# Altium PCB Kicker.PcbDoc (part 2 of 2)
Units mil, origin at the board's own origin, x right, y up, seen from the top; angles counter-clockwise.
Board outline 3322.83 x 1346.46 mil, 2 copper layers (Top Layer, Bottom Layer), stack 30.748 mil thick; 41 components, 31 nets, 116 pads, 28 vias.
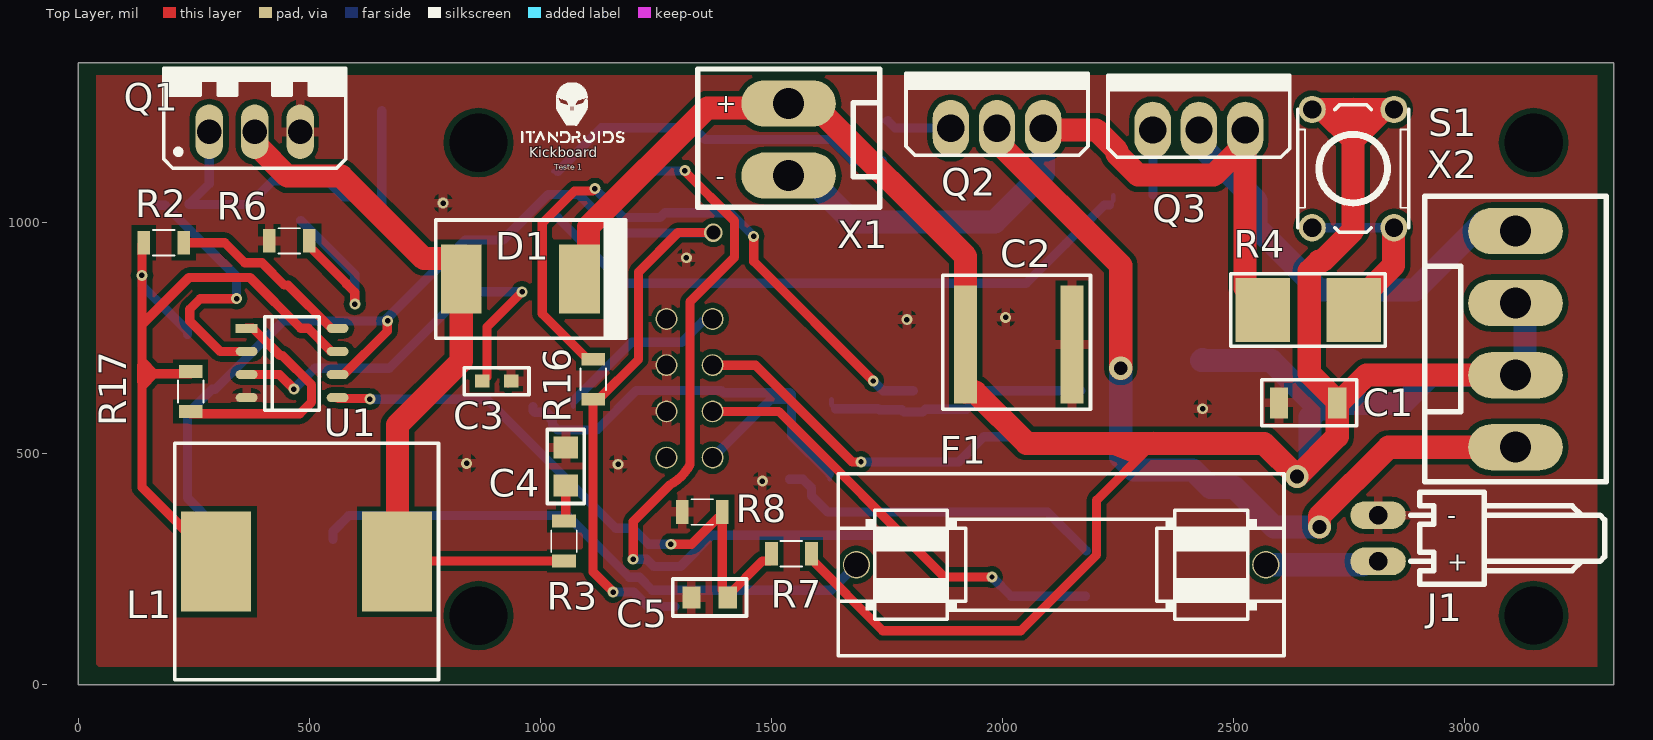
[diagram p0: Top Layer view]

## Part data (continued)
R8 R11 R12 R16: "PANASONIC ELECTRONIC COMPONENTS - ERJ6ENF1201V - RES, THICK FILM, 1K2, 125MW, 1%, REEL", Case Code (Imperial)=0805, Case Code (Metric)=2012, Manufacturer=Panasonic, Manufacturer Part Number=ERJ-6ENF1201V, Max Operating Temperature=155°C, Max Power Dissipation=125mW, Min Operating Temperature=-55°C, Package Quantity=1, Resistance=1.2kR, Temperature Coefficient=100ppm/°C, Tolerance=1%, Voltage Rating=150V, Case/Package=0805, Category="Chip SMD Resistors", ComponentLink1Description=https://datasheet.ciiva.com/11821/0900766b80f80784-11821543.pdf?src-supplier=RSComponents, ComponentLink1URL=https://datasheet.ciiva.com/11821/0900766b80f80784-11821543.pdf?src-supplier=RSComponents, ComponentLink2Description=https://datasheet.ciiva.com/7802/426256-7802438.pdf?src-supplier=Element14, ComponentLink2URL=https://datasheet.ciiva.com/7802/426256-7802438.pdf?src-supplier=Element14, ComponentLink3Description=https://datasheet.ciiva.com/16775/70260748-16775350.pdf?src-supplier=Allied+Electronics, ComponentLink3URL=https://datasheet.ciiva.com/16775/70260748-16775350.pdf?src-supplier=Allied+Electronics, ComponentLink4Description=https://datasheet.ciiva.com/9198/aoa0000ce2-9198663.pdf?src-supplier=Avnet, ComponentLink4URL=https://datasheet.ciiva.com/9198/aoa0000ce2-9198663.pdf?src-supplier=Avnet, ComponentLink5Description=https://datasheet.ciiva.com/22687/1678782-22687448.pdf?src-supplier=Element14, ComponentLink5URL=https://datasheet.ciiva.com/22687/1678782-22687448.pdf?src-supplier=Element14, ComponentLink6Description=https://datasheet.ciiva.com/46372/1678782-46372712.pdf?src-supplier=Element14, ComponentLink6URL=https://datasheet.ciiva.com/46372/1678782-46372712.pdf?src-supplier=Element14, ComponentLink7Description=https://datasheet.ciiva.com/46372/1678782-46372713.pdf?src-supplier=Element14, ComponentLink7URL=https://datasheet.ciiva.com/46372/1678782-46372713.pdf?src-supplier=Element14, ComponentLink8Description=https://datasheet.ciiva.com/22667/1678782-22667898.pdf?src-supplier=Element14, ComponentLink8URL=https://datasheet.ciiva.com/22667/1678782-22667898.pdf?src-supplier=Element14, ComponentLink9Description=https://datasheet.ciiva.com/17215/aoa0000ce2-17215019.pdf?src-supplier=Avnet+Europe, ComponentLink9URL=https://datasheet.ciiva.com/17215/aoa0000ce2-17215019.pdf?src-supplier=Avnet+Europe, ComponentLink10Description=https://datasheet.ciiva.com/6138/426256-6138188.pdf?src-supplier=Farnell, ComponentLink10URL=https://datasheet.ciiva.com/6138/426256-6138188.pdf?src-supplier=Farnell, ComponentLink11Description=https://datasheet.ciiva.com/24069/aoa0000ce2-24069708.pdf?src-supplier=Mouser, ComponentLink11URL=https://datasheet.ciiva.com/24069/aoa0000ce2-24069708.pdf?src-supplier=Mouser, ComponentLink12Description=https://datasheet.ciiva.com/30129/aoa0000ce2-30129052.pdf?src-supplier=Onlinecomponents.com, ComponentLink12URL=https://datasheet.ciiva.com/30129/aoa0000ce2-30129052.pdf?src-supplier=Onlinecomponents.com, ComponentLink13Description=https://datasheet.ciiva.com/16773/70260748-16773646.pdf?src-supplier=Allied+Electronics, ComponentLink13URL=https://datasheet.ciiva.com/16773/70260748-16773646.pdf?src-supplier=Allied+Electronics, Composition="Thick Film", Contact Plating=Tin, Depth=1.25mm, Features="Automotive AEC-Q200", Height=0.6mm, Lead Free="Lead Free", Length=2mm, Military Standard=Not, Mount="Surface Mount", Number of Terminations=2, Packaging="Tape and Reel", Power Rating=125mW, Pricing 1="1=0,10000, 10=0,07200, 100=0,02750, 1000=0,01210, 2500=0,01045 (USD)", Radiation Hardening=No, REACH SVHC="No SVHC", RoHS=Yes, Stock 1=22603, Supplier 1=Digi-Key, Termination=SMD/SMT, Voltage Rating (DC)=150V, Width=0.049inch
R9 R15: library part Res_390R_0805, "RES SMD 0805 390R 5% 1/8W", Supplier Part Number 1=311-390ARDKR-ND, Tolerance=1%, Supplier 1=Digi-Key
S1: "Switch Tactile N.O. SPST Flat Plunger PC Pins 0.05A 24VDC 2.55N Thru-Hole Bag", Contact Current Rating=50mA, Contact Resistance=100mR, Manufacturer=Omron, Max Operating Temperature=70°C, Max Voltage Rating (DC)=24V, Min Operating Temperature=-25°C, Operating Force=2.55N, Package Quantity=1500, Actuator Length=0.9mm, Actuator Type=Standard, Category="Switch Accessories", ComponentLink1Description=https://datasheet.ciiva.com/1532/611570-1532565.pdf?src-supplier=Element14, ComponentLink1URL=https://datasheet.ciiva.com/1532/611570-1532565.pdf?src-supplier=Element14, ComponentLink2Description=https://datasheet.ciiva.com/48509/b3f-48509461.pdf?src-supplier=Distrelec, ComponentLink2URL=https://datasheet.ciiva.com/48509/b3f-48509461.pdf?src-supplier=Distrelec, ComponentLink3Description=https://datasheet.ciiva.com/2899/b3f-0811-2899831.pdf?src-supplier=Digi-Key, ComponentLink3URL=https://datasheet.ciiva.com/2899/b3f-0811-2899831.pdf?src-supplier=Digi-Key, ComponentLink4Description=https://datasheet.ciiva.com/7986/en-b3f-7986906.pdf?src-supplier=Element14, ComponentLink4URL=https://datasheet.ciiva.com/7986/en-b3f-7986906.pdf?src-supplier=Element14, ComponentLink5Description=https://datasheet.ciiva.com/16154/en-b3f-16154890.pdf?src-supplier=Onlinecomponents.com, ComponentLink5URL=https://datasheet.ciiva.com/16154/en-b3f-16154890.pdf?src-supplier=Onlinecomponents.com, Contact Material=Gold,Silver, Contact Plating=Silver,Gold, Current Rating=50mA, Depth=6mm, Electrical Life=300000Cycles, Height=4.3mm, Illumination Type=Non-Illuminated,Illuminated, Lead Free="Lead Free", Length=6mm, Manufacturer Part Number=B3F-1005, Max Current Rating=50mA, Mechanical Life=100000Cycles, Mount="Through Hole", Number of Poles=1, Orientation=Straight, Packaging=Bag, Pricing 1="1=0,33000, 10=0,31400, 25=0,29800, 100=0,26990, 250=0,24608, 500=0,22872, 1000=0,19512, 2500=0,18970, 5000=0,17886 (USD)", REACH SVHC=Unknown, RoHS=Yes, Stock 1=3042, Supplier 1=Digi-Key, Switch Function=Off-Mom, Switch Travel=0.25mm, Termination="PC Pins", Throw Configuration=SPST, Voltage Rating (DC)=24V, Weight=0.25g, Width=6mm
SV1: "Conn Unshrouded Header HDR 8 POS 2.54mm Solder ST Thru-Hole Tray", Contact Resistance=20mR, Current Rating=3A, Housing Color=Black, Insulation Resistance=5GR, Manufacturer=Molex, Max Operating Temperature=125°C, Min Operating Temperature=-55°C, Package Quantity=2400, Voltage Rating=350V, Category=Connectors, ComponentLink1Description=https://datasheet.ciiva.com/30231/0901310764-pcb-headers-30231232.pdf?src-supplier=Onlinecomponents.com, ComponentLink1URL=https://datasheet.ciiva.com/30231/0901310764-pcb-headers-30231232.pdf?src-supplier=Onlinecomponents.com, ComponentLink2Description=https://datasheet.ciiva.com/11748/0900766b81280103-11748626.pdf?src-supplier=RSComponents, ComponentLink2URL=https://datasheet.ciiva.com/11748/0900766b81280103-11748626.pdf?src-supplier=RSComponents, ComponentLink3Description=https://datasheet.ciiva.com/5158/0901310764-pcb-headers-151525-5158722.pdf?src-supplier=Mouser, ComponentLink3URL=https://datasheet.ciiva.com/5158/0901310764-pcb-headers-151525-5158722.pdf?src-supplier=Mouser, Contact Material=Brass, Contact Plating=Gold, Gender=Male, Housing Material=Polyester, Lead Free="Lead Free", Lead Pitch=2.54mm, Manufacturer Part Number=90131-0764, Mount="Through Hole", Number of Contacts=8, Number of Poles=8, Number of Positions=8, Number of Rows=2, Orientation=Straight, Packaging=Tray, Pitch=2.54mm, Pricing 1="1=2,24000, 10=2,03400, 100=1,74300, 500=1,45250, 1000=1,24500, 5000=1,10390, 10000=1,07900 (USD)", Radiation Hardening=No, REACH SVHC=Unknown, RoHS=Yes, Stock 1=1061, Supplier 1=Digi-Key, Termination=Solder, Voltage Rating (AC)=350V, Working Voltage=350V
T1: "TRANS PNP 40V 0.2A SOT23-3", Case/Package=SOT-23, Collector Base Voltage (VCBO)=40V, Collector Emitter Saturation Voltage=-400mV, Continuous Collector Current=-200mA, Emitter Base Voltage (VEBO)=6V, Frequency=250MHz, Manufacturer="Diodes Zetex", Max Collector Current=200mA, Max Operating Temperature=150°C, Max Power Dissipation=300mW, Min Operating Temperature=-55°C, Package Quantity=3000, Voltage Rating (DC)=-40V, Category=BJTs, Collector Emitter Breakdown Voltage=40V, Collector Emitter Voltage (VCEO)=40V, ComponentLink1Description=https://datasheet.ciiva.com/27052/1540746-27052408.pdf?src-supplier=Jameco, ComponentLink1URL=https://datasheet.ciiva.com/27052/1540746-27052408.pdf?src-supplier=Jameco, ComponentLink2Description=https://datasheet.ciiva.com/15139/getdatasheetpartid-255292-15139821.pdf?src-supplier=Verical, ComponentLink2URL=https://datasheet.ciiva.com/15139/getdatasheetpartid-255292-15139821.pdf?src-supplier=Verical, Contact Plating=Tin,Matte, Current Rating=-200mA, Element Configuration=Single, Gain Bandwidth Product=250MHz, Height=1mm, hFE Min=100, Lead Free="Lead Free", Length=3.05mm, Manufacturer Part Number=MMBT3906-7-F, Max Breakdown Voltage=40V, Max Frequency=250MHz, Mount="Surface Mount", Number of Elements=1, Number of Pins=3, Packaging="Tape and Reel", Polarity=PNP, Power Dissipation=300mW, Pricing 1="1=0,12000, 10=0,10600, 25=0,10120, 100=0,04440, 250=0,04268, 500=0,03490, 1000=0,02424 (USD)", Radiation Hardening=No, REACH SVHC="No SVHC", RoHS=Yes, Stock 1=42541, Supplier 1=Digi-Key, Transition Frequency=250MHz, Weight=0.000282oz, Width=1.4mm
U1: "Conv DC-DC Step Down/Step Up 3V to 40V 8-Pin SO N T/R", Case/Package=SO, Manufacturer=STMicroelectronics, Max Input Voltage=40V, Max Operating Temperature=125°C, Max Output Current=1.5A, Max Output Voltage=38V, Min Input Voltage=3V, Min Operating Temperature=-40°C, Min Output Voltage=1.25V, Package Quantity=1, Switching Frequency=100kHz, Category="Voltage Regulators - Switching", ComponentLink1Description=https://datasheet.ciiva.com/4878/cd00001232-4878840.pdf?src-supplier=Mouser, ComponentLink1URL=https://datasheet.ciiva.com/4878/cd00001232-4878840.pdf?src-supplier=Mouser, ComponentLink2Description=https://datasheet.ciiva.com/2029/cd00001232-2029723.pdf?src-supplier=Digi-Key, ComponentLink2URL=https://datasheet.ciiva.com/2029/cd00001232-2029723.pdf?src-supplier=Digi-Key, ComponentLink3Description=https://datasheet.ciiva.com/17297/cd00001232-17297035.pdf?src-supplier=Avnet+Europe, ComponentLink3URL=https://datasheet.ciiva.com/17297/cd00001232-17297035.pdf?src-supplier=Avnet+Europe, ComponentLink4Description=https://datasheet.ciiva.com/2029/cd00001232-2029724.pdf?src-supplier=Digi-Key, ComponentLink4URL=https://datasheet.ciiva.com/2029/cd00001232-2029724.pdf?src-supplier=Digi-Key, ComponentLink5Description=https://datasheet.ciiva.com/16209/cd00001232-16209900.pdf?src-supplier=Future+Electronics, ComponentLink5URL=https://datasheet.ciiva.com/16209/cd00001232-16209900.pdf?src-supplier=Future+Electronics, ComponentLink6Description=https://datasheet.ciiva.com/2029/cd00001232-2029725.pdf?src-supplier=Digi-Key, ComponentLink6URL=https://datasheet.ciiva.com/2029/cd00001232-2029725.pdf?src-supplier=Digi-Key, Contact Plating=Gold, Efficiency=89%, Height=1.65mm, Lead Free="Lead Free", Length=5mm, Manufacturer Part Number=MC34063EBD-TR, Mount="Surface Mount", Number of Outputs=1, Number of Pins=8, Output Current=1.5A, Output Type=Adjustable,Fixed, Output Voltage=38V, Packaging="Tape and Reel", Pricing 1="1=0,66000, 10=0,56100, 25=0,52360, 100=0,38900, 250=0,32912, 500=0,31416, 1000=0,23188 (USD)", Radiation Hardening=No, REACH SVHC="No SVHC", RoHS=Yes, Stock 1=77713, Supplier 1=Digi-Key, Synchronous Rectifier=No, Width=4mm
X1: library part "CONN HEADER R_A 2POS 3.96MM", "Conn Wire to Board HDR 2 POS 3.96mm Solder RA Thru-Hole KK® Bag", Color=Natural, Contact Resistance=10mR, Housing Color=White, Manufacturer 1=Molex, Manufacturer Part Number 1=26-60-5020, Max Operating Temperature=75°C, Min Operating Temperature=0°C, Supplier Part Number 1=WM4640-ND, ComponentLink1Description=https://datasheet.ciiva.com/711/026605020-sd-711883.pdf?src-supplier=Digi-Key, ComponentLink1URL=https://datasheet.ciiva.com/711/026605020-sd-711883.pdf?src-supplier=Digi-Key, ComponentLink2Description=https://datasheet.ciiva.com/22827/0900766b80d6bf1d-22827278.pdf?src-supplier=RSComponents, ComponentLink2URL=https://datasheet.ciiva.com/22827/0900766b80d6bf1d-22827278.pdf?src-supplier=RSComponents, ComponentLink3Description=https://datasheet.ciiva.com/30179/80070026605020-pcb-headers-30179412.pdf?src-supplier=Onlinecomponents.com, ComponentLink3URL=https://datasheet.ciiva.com/30179/80070026605020-pcb-headers-30179412.pdf?src-supplier=Onlinecomponents.com, ComponentLink4Description=https://datasheet.ciiva.com/15217/getdatasheetpartid-299439-15217821.pdf?src-supplier=Verical, ComponentLink4URL=https://datasheet.ciiva.com/15217/getdatasheetpartid-299439-15217821.pdf?src-supplier=Verical, Connector Type="Male Pin", Contact Material=Bronze,Brass, Contact Mating Length=0.45inch, Contact Plating=Tin,Copper, Depth=23.14mm, Fastening Type=Friction, Gender=Male, Housing Material=Polyester, Length=7.77mm, Mount="Through Hole", Number of Contacts=2, Number of Positions=2, Number of Rows=1, Orientation="Right Angle", Packaging=Bulk, Pitch=3.96mm, Pricing 1="1=0,32000, 10=0,30300, 100=0,21240, 500=0,18202, 1000=0,15169, 5000=0,13002, 10000=0,12135 (USD)", RoHS=Yes, Stock 1=7578, Supplier 1=Digi-Key, Termination=Solder
X2: library part "CONN HEADER R_A 4POS 3.96MM", "Headers & Wire Housings R/A PCB HDR 4P TIN FRICTION LOCK", Contact Resistance=10mR, Current Rating=7A, Flammability Rating="UL94 V-0", Housing Color=Natural, Insulation Resistance=50GR, Manufacturer 1=Molex, Manufacturer Part Number 1=26-60-5040, Max Operating Temperature=75°C, Min Operating Temperature=0°C, Package Quantity=350, Voltage Rating=250V, ComponentLink1Description=https://datasheet.ciiva.com/19454/880132-19454025.pdf?src-supplier=Jameco, ComponentLink1URL=https://datasheet.ciiva.com/19454/880132-19454025.pdf?src-supplier=Jameco, ComponentLink2Description=https://datasheet.ciiva.com/10029/0026605040-pcb-headers-10029266.pdf?src-supplier=Avnet, ComponentLink2URL=https://datasheet.ciiva.com/10029/0026605040-pcb-headers-10029266.pdf?src-supplier=Avnet, ComponentLink3Description=https://datasheet.ciiva.com/7844/1631036-7844119.pdf?src-supplier=Element14, ComponentLink3URL=https://datasheet.ciiva.com/7844/1631036-7844119.pdf?src-supplier=Element14, ComponentLink4Description=https://datasheet.ciiva.com/5157/0026605040-pcb-headers-159671-5157677.pdf?src-supplier=Mouser, ComponentLink4URL=https://datasheet.ciiva.com/5157/0026605040-pcb-headers-159671-5157677.pdf?src-supplier=Mouser, ComponentLink5Description=https://datasheet.ciiva.com/11749/0900766b80d6bf1d-11749079.pdf?src-supplier=RSComponents, ComponentLink5URL=https://datasheet.ciiva.com/11749/0900766b80d6bf1d-11749079.pdf?src-supplier=RSComponents, ComponentLink6Description=https://datasheet.ciiva.com/30188/171410026605040-pcb-headers-30188011.pdf?src-supplier=Onlinecomponents.com, ComponentLink6URL=https://datasheet.ciiva.com/30188/171410026605040-pcb-headers-30188011.pdf?src-supplier=Onlinecomponents.com, Contact Gender=Male, Contact Material=Brass,Bronze,Tin, Contact Plating=Tin,Copper, Gender=Male, Glow Wire Compliant=Non-compliant, Housing Material=Polyester, Lead Free="Lead Free", Material=Polyester, Mount="Through Hole", Number of Circuits=4, Number of Contacts=4, Number of Lines=1, Number of Poles=4, Number of Positions=4, Number of Rows=1, Orientation="Right Angle", Packaging=Bulk, Pitch=3.96mm, Pricing 1="1=0,37980, 10=0,35730, 100=0,28160, 500=0,24650, 1000=0,20520, 5000=0,18050, 10000=0,16730, 1=0,42000, 10=0,39510, 100=0,31430, 500=0,27630, 1000=0,26400, 1=0,41740, 10=0,38930, 100=0,29830, 500=0,25770, 1000=0,21140, 5000=0,18430, 10000=0,17000 (USD)", Radiation Hardening=No, REACH SVHC=Unknown, RoHS=Yes, Stock 1=13747, Supplier 1=Arrow, Supplier Part Number 1=26-60-5040, Termination=Solder, Voltage Rating (DC)=250V

## Free pads (board coordinates)
  round 78.74 hole 125.98 unplated: ""(866.14,149.61) ""(866.14,1173.23) ""(3149.61,149.8) ""(3149.61,1173.23)

## Via types
v1: diameter 23.62, hole 11.81, Top Layer to Bottom Layer, tented top, 14 vias
v2: diameter 23.62, hole 11.81, Top Layer to Bottom Layer, 10 vias
v3: diameter 50, hole 30, Top Layer to Bottom Layer, tented top, 3 vias
v4: diameter 40, hole 30, Top Layer to Bottom Layer, tented top, 1 vias

## Nets (pads, with @x,y where several pads share a name; then routed paths per layer and width w, separated by ;. In a path a pad name is that pad's centre, name@x,y a point inside that pad or via, vN(x,y) a via of type N, cw(c..) or ccw(c..) an arc to the next point about the centre after c; other vN are vias at no path point)
+3V3: R9.2 R11.2 R15.2 SV1.2 | length 1091.2
  Bottom Layer w10: 1022.37,575.4 1022.37,580.71 ; R15.2@1534.53,632.17 1543.31,623.39 R15.2 ; R9.2 R9.2@1625.98,456.7
  Bottom Layer w20: R11.2 984.25,593.48 988.03,589.7 1013.38,589.7 1022.37,580.71 ; 1022.37,575.4 1026.07,571.7 1026.07,562.9 1037.78,551.18 1122.05,551.18 1208.03,637.17 1291.65,637.17 1354.02,637.17 1391.65,637.17 1396.65,632.17 1539.53,632.17 1543.31,628.39 R15.2 ; SV1.2 1499.21,618.11 R15.2 ; R9.2@1625.98,456.7 1543.31,539.37 R15.2
GND: C1.2 C2.2 C3.2 C4.2 C5.2 IC1.4 IC2.3 IC4.4 J1.1 Q1.S R5.1 R6.1 R8.1 SV1.3 SV1.5 SV1.7 T1.C U1.4 | length 36
  Top Layer w15: C3.2@930.12,650.59 C3.2 ; C4.2@1039.37,509.84 1049.21,519.68 C4.2
  Top Layer w20: C5.2 C5.2@1326.77,192.91
  other v2: 1480.32,440.94 1168.31,477.36 840.55,479.33 2433.07,597.44 1793.31,790.35 2006.89,795.28 1315.87,924.13 789.37,1042.32
GNDA: Q2.S Q3.S R4.2 X1.2 | length 1650.5
  Top Layer w50: Q2.S 2092.13,1200.79 2202.56,1200.79 2248.1,1155.25 2248.1,1148.49 2293.64,1102.95 2456.75,1102.95 Q3.S@2525.2,1171.4 ; Q3.S Q3.S@2525.2,1171.4 ; R4.2 2562.99,820.87 2525.2,858.66 Q3.S@2525.2,1171.4
  Bottom Layer w50: X1.2 1576.12,1101.93 1676.08,1001.97 1983.27,1001.97 2088.19,1106.89 Q2.S
NetC3_1: C3.1 U1.3 | length 926.5
  Top Layer w10: C3.1 875.98,657.48 C3.1@884.76,666.26
  Top Layer w20: U1.3 435.2,671.46 v1(466.69,639.96) ; C3.1@884.76,666.26 884.76,774.53 v1(960.63,850.39)
  Bottom Layer w20: v1(466.69,639.96) 511.77,685.04 673.23,685.04 838.58,850.39 v1(960.63,850.39)
NetC4_1: C4.1 R3.1 | length 90.1
  Top Layer w20: R3.1 R3.1@1051.34,354.33 ; C4.1 1055.12,358.11 R3.1@1051.34,354.33 ; R3.1@1062.99,354.33 R3.1@1051.34,354.33
NetC5_1: C5.1 R7.2 R8.2 U1.5 | length 1305
  Top Layer w10: U1.5 U1.5@562.85,619.78 ; v1@629.23,619.78 v1(630.91,618.11) ; R8.2@1385.28,362.2 R8.2@1393.7,362.2
  Top Layer w20: U1.5@562.85,619.78 v1@629.23,619.78 ; v1(1282.48,304.13) 1327.21,304.13 R8.2@1385.28,362.2 ; R8.2@1393.7,362.2 1393.7,204.72 C5.1@1405.51,192.91 ; C5.1 C5.1@1405.51,192.91 ; R7.2 1500,271.65 1496.22,267.87 1480.47,267.87 C5.1@1405.51,192.91
  Bottom Layer w20: v1(630.91,618.11) 883.86,618.11 1163.39,338.58 1199.8,338.58 1234.25,304.13 v1(1282.48,304.13)
NetD1_2: D1.2 L1.1 Q1.D R3.2 | length 1638
  Top Layer w20: L1.1 690.94,267.72 R3.2
  Top Layer w50: Q1.D 381.89,1170.5 389.6,1162.8 390.83,1162.8 452.64,1100.98 569.29,1100.98 748.05,922.23 809.45,922.23 828.74,902.93 828.74,700.19 690.94,562.4 L1.1@690.94,267.72
NetD2_1: D2.1 Q1.G R5.2 T1.E | length 926.8
  Bottom Layer w10: T1.E T1.E@240.42,1041.34 ; D2.1@620.77,1056.87 D2.1@656.5,1021.14
  Bottom Layer w20: T1.E 369.83,1039.37 421.01,1090.55 539.37,1090.55 573.82,1056.1 610.04,1056.1 614.27,1051.87 625.77,1051.87 650.75,1026.89 650.75,1015.39 D2.1 ; T1.E@240.42,1041.34 283.46,1084.38 Q1.G ; D2.1@656.5,1021.14 R5.2
NetD2_2: D2.2 R6.2 | length 435.9
  Top Layer w20: R6.2@496.22,976.22 500,972.44 R6.2 500,948.82 579.72,869.09 579.72,868.11 598.43,849.41 v2(598.43,823.82)
  Bottom Layer w10: D2.2@484.25,996.38 484.25,1002.13 D2.2
  Bottom Layer w20: D2.2@481.38,1005 484.25,1002.13 598.43,887.95 598.43,865.63 v2(598.43,823.82)
NetD5_2: D5.2 F1.1 | length 1253.5
  Bottom Layer w20: D5.2 551.18,331.85 585.47,366.14 1058.75,366.14 1192.29,232.6 1214.53,232.6 1242.25,204.88 1629.09,204.88 F1.1
NetF1_2: F1.2 J1.2 | length 270.6
  Bottom Layer w20: J1.2@2779.65,259.84 2793.82,274.02 J1.2@2834.65,274.02
  Bottom Layer w50: F1.2 J1.2@2779.65,259.84
NetIC1_1: IC1.1 R9.1 | length 715.8
  Bottom Layer w20: R9.1 1568.15,444.89 1586.69,426.34 1586.69,409.37 1622.05,374.02 2097.24,374.02 IC1.1
NetIC1_2: IC1.2 SV1.4 | length 974.6
  Top Layer w20: SV1.4 1515.55,591.73 1874.02,233.27 v1(1977.36,233.27)
  Bottom Layer w10: IC1.2@2179.72,191.54 IC1.2
  Bottom Layer w20: v1(1977.36,233.27) 2019.09,191.54 IC1.2@2179.72,191.54
NetIC1_3: IC1.3 IC2.2 R12.1 | length 1709.3
  Top Layer w10: 1279.48,432.04 1287.54,437.09 ; v1@1312.6,1111.39 v1(1312.6,1112.6)
  Top Layer w20: v1(1200.79,271.65) 1200.79,353.35 1279.45,432.01 ; 1287.54,437.09 ccw(c1233.59,523.3) 1323.82,476.38 1323.82,828.74 1420.28,925.2 1420.28,1003.71 v1@1312.6,1111.39
  Bottom Layer w10: IC2.2 IC2.2@1248.82,1111.81 ; v1@1311.81,1111.81 v1(1312.6,1112.6)
  Bottom Layer w20: v1(1200.79,271.65) 1229.74,271.65 1245.48,255.91 1303.15,255.91 1371.06,323.82 1785.24,323.82 IC1.3 ; IC2.2@1248.82,1111.81 v1@1311.81,1111.81
NetIC2_4: IC2.4 IC4.3 R16.1 | length 1409.1
  Top Layer w10: R16.1@1102.36,704.72 R16.1 ; v1@1113.19,1068.9 v1(1118.01,1073.71)
  Top Layer w20: R16.1@1102.36,704.72 1003.94,803.15 1003.94,998.7 1074.14,1068.9 v1@1113.19,1068.9 ; v1(1461.61,970.47) 1461.61,916.34 v1(1720.47,657.48)
  Bottom Layer w10: 1145.84,1045.11 1145.84,1045.88 ; 1347.44,1021.65 1351.89,1026.1
  Bottom Layer w20: v1(1118.01,1073.71) 1145.84,1045.88 ; 1145.84,1045.11 1179.92,1011.02 1259,1011.02 1269.63,1021.65 1347.44,1021.65 1410.43,1021.65 v1(1461.61,970.47) ; v1(1720.47,657.48) 1741.34,636.61 IC4.3
NetIC2_5: IC2.5 R14.2 | length 1356.9
  Bottom Layer w10: IC2.5 IC2.5@1037.71,1011.02 ; R14.2@2231.38,1038.46 2240.16,1047.24 R14.2
  Bottom Layer w20: IC2.5@1037.71,1011.02 1179.58,869.15 2051.24,869.15 2136.81,954.72 2220.55,1038.46 R14.2@2231.38,1038.46
NetIC2_7: IC2.7 R13.1 | length 781.6
  Bottom Layer w10: IC2.7 IC2.7@1037.71,1111.02 ; R13.1@1739.84,1134.17 R13.1
  Bottom Layer w20: IC2.7@1037.71,1111.02 1132.4,1205.71 1330.71,1205.71 1356.3,1180.12 1630.18,1180.12 1676.13,1134.17 R13.1@1739.84,1134.17
NetIC4_1: IC4.1 R15.1 | length 577.1
  Bottom Layer w10: R15.1 1629.92,606.3 R15.1@1638.7,597.52 ; 1730.81,597.52 1733.12,595.2
  Bottom Layer w20: R15.1@1638.7,597.52 1730.81,597.52 ; 1733.12,595.2 1781.88,595.2 1786.88,590.2 1827.3,590.2 1833.56,596.46 1922.21,596.46 1962.37,636.61 IC4.1
NetIC4_2: IC4.2 SV1.6 | length 905.7
  Top Layer w20: SV1.6 1465.75,691.73 1675.2,482.28 v1(1693.9,482.28)
  Bottom Layer w20: v1(1693.9,482.28) 1905.09,482.28 1959.42,536.61 IC4.2
NetL1_2: L1.2 R1.1 R2.2 R17.2 U1.7 | length 1563.3
  Top Layer w20: R2.2 137.95,952.91 137.95,929.62 137.72,929.39 v1(137.72,885.91) 137.72,779.57 ; R17.2@243.11,673.23 137.72,673.23 ; L1.2 137.72,427.24 137.72,673.23 ; U1.7 547.72,721.46 497.72,771.46 481.5,771.46 371.54,881.41 239.56,881.41 137.72,779.57 ; 137.72,673.23 137.72,779.57
  Bottom Layer w20: v1(137.72,885.91) 138.41,885.21 138.41,863.56 236.22,765.75 R1.1
NetQ2_G: Q2.G R13.2 | length 154.6
  Bottom Layer w10: R13.2 R13.2@1751.97,1220.47
  Bottom Layer w20: R13.2@1751.97,1220.47 1767.72,1204.72 Q2.G
NetQ3_G: Q3.G R14.1 | length 142.4
  Bottom Layer w10: Q3.G Q3.G@2325.99,1200 ; R14.1@2325.99,1059.84 R14.1
  Bottom Layer w20: R14.1@2325.99,1059.84 Q3.G@2325.99,1200
NetR2_1: R2.1 U1.8 | length 409.6
  Top Layer w10: 445.86,865 453.86,865 ; U1.8@547.4,771.46 U1.8
  Top Layer w20: R2.1 316.93,956.69 360.4,913.22 397.64,913.22 445.86,865 ; 453.86,865 U1.8@547.4,771.46
NetR4_1: R4.1 S1.3 S1.4 | length 439.8
  Top Layer w50: R4.1@2793.9,845.08 R4.1 2759.84,820.87 2846.46,907.48 2846.46,988.19 S1.3
  Bottom Layer w20: S1.4 S1.3
NetR11_1: R11.1 SV1.8 | length 387.3
  Bottom Layer w10: R11.1 R11.1@1070.87,614.17
  Bottom Layer w20: R11.1@1070.87,614.17 1197.83,741.14 1306.1,741.14 1351.48,786.52 1367.62,786.52 SV1.8
NetR17_1: R17.1 U1.1 | length 500.7
  Top Layer w20: R17.1@243.11,586.61 479.33,586.61 504.92,612.2 504.92,649.28 441.61,712.59 436.66,712.59 377.8,771.46 U1.1
NetT1_B: T1.B U1.2 | length 573.2
  Top Layer w20: v2(342.52,835.63) 263.78,835.63 241.14,812.99 241.14,787.4 307.09,721.46 U1.2
  Bottom Layer w20: T1.B 169.55,1037.72 169.71,1037.56 188.43,1037.56 342.52,883.47 v2(342.52,835.63)
VCC: D5.1 IC2.6 R1.2 R12.2 R16.2 U1.6 | length 2938.3
  Top Layer w20: U1.6 574.65,671.46 668.6,765.41 668.6,786.71 v1(669.29,787.4) ; v1(1157.48,200.79) 1114.17,244.09 R16.2 1125.98,618.11 1212.6,704.72 1212.6,893.31 1297.95,978.66 v4(1374.33,978.66)
  Bottom Layer w20: D5.1 295.28,345.28 236.22,404.33 R1.2 236.22,586.61 289.21,639.61 296.1,639.61 443.9,787.4 v1(669.29,787.4) ; v1@665.94,790.75 837.8,962.6 918.98,962.6 1017.41,1061.02 IC2.6 1083.15,1061.02 1166.46,977.71 1373.38,977.71 v4(1374.33,978.66) ; v1(1157.48,200.79) 1201.36,200.79 1232.85,169.29 R12.2
X2-1: D3.2 Q2.D X2.1 | length 1824.6
  Top Layer w50: Q2.D 1988.19,1175.33 2255.91,907.62 v3(2255.91,685.04) ; v3(2686.02,341.54) 2686.02,364.67 2835.53,514.17 X2.1
  Bottom Layer w50: v3(2255.91,685.04) 2255.91,493.31 2284.06,465.16 2411.81,465.16 2450.39,426.57 2502.56,426.57 2587.6,341.54 v3(2686.02,341.54)
X2-2: C1.1 C2.1 D1.1 D3.1 D4.1 R7.1 S1.1 S1.2 X1.1 X2.2 X2.3 | length 5924.1
  Top Layer w10: R7.1@1586.61,271.65 R7.1
  Top Layer w20: R7.1@1586.61,271.65 1741.14,117.13 2039.37,117.13 2203.74,281.5 2203.74,399.61 2326.77,522.64
  Top Layer w50: D1.1 1103.94,897.24 1103.94,990.88 1361.32,1248.27 X1.1@1527.72,1248.27 ; X1.1 1589.65,1257.83 1920.43,927.05 C2.1 1920.43,633.27 1941.54,633.27 2052.17,522.64 2326.77,522.64 2565.94,522.64 v3(2637.8,450.79) 2724.41,537.4 C1.1@2724.41,607.09 ; S1.2 2758.86,1245.08 ; S1.1 2758.86,1245.08 ; X2.2 2787.4,670.08 C1.1@2724.41,607.09 ; C1.1@2724.41,607.09 C1.1 2724.41,613.39 2663.98,673.82 2663.98,895.17 2685.54,916.73 2691.65,916.73 2758.86,983.94 2758.86,1245.08
  Bottom Layer w50: D3.1@2433.07,703.74 D3.1 2581.89,701.77 2674.97,608.69 2865.16,608.69 2925.75,669.29 3129.92,669.29 3130.71,670.08 3130.71,805.51 X2.3 ; v3(2637.8,450.79) 2665.94,478.94 2665.94,579.13 2683.27,596.46 D4.1@2713.58,596.46
X2-4: D4.2 Q3.D X2.4 | length 955
  Bottom Layer w50: Q3.D 2425.2,1171.4 2548.32,1048.27 2548.32,991.25 2685.24,854.33 D4.2 2892.52,854.33 3038.98,1000.79 X2.4@3125.43,1000.79
pads on no net: IC2.1 IC2.8 SV1.1

## Polygon pours and split planes (outlines as drawn)
GND on Top Layer "GND_L01_P019" (solid, pour order 19): 39.37,39.37 39.37,1318.9 3287.4,1318.9 3287.4,39.37
GND on Bottom Layer "GND_L02_P018" (solid, pour order 18): 39.37,39.37 39.37,1318.9 3287.4,1318.9 3287.4,39.37

## Silkscreen, mask and mechanical layers (free items; w line width, h text height)
Top Overlay:
  drawing of 18 lines, arcs and shapes, not listed
  text "Kickboard" at 976.33,1142.09 h21.49
  text "Teste 1" at 1030.52,1114.17 h11.81

## Text inside footprints (layer, text, board x,y; h text height)
J1: Top Overlay "-" at 2962.99,347.16 h39.37; Top Overlay "+" at 2962.99,247.16 h39.37
X1: Top Overlay "-" at 1379.8,1081.46 h39.37; Top Overlay "+" at 1379.8,1238.94 h39.37